# Altium PCB kicanka_PCB.PcbDoc
Units mm, origin at the board's own origin, x right, y up, seen from the top; angles counter-clockwise.
Board outline 25 x 33.67 mm, 2 copper layers (Top Layer, Bottom Layer); 2 components, 2 nets, 5 pads, 0 vias.
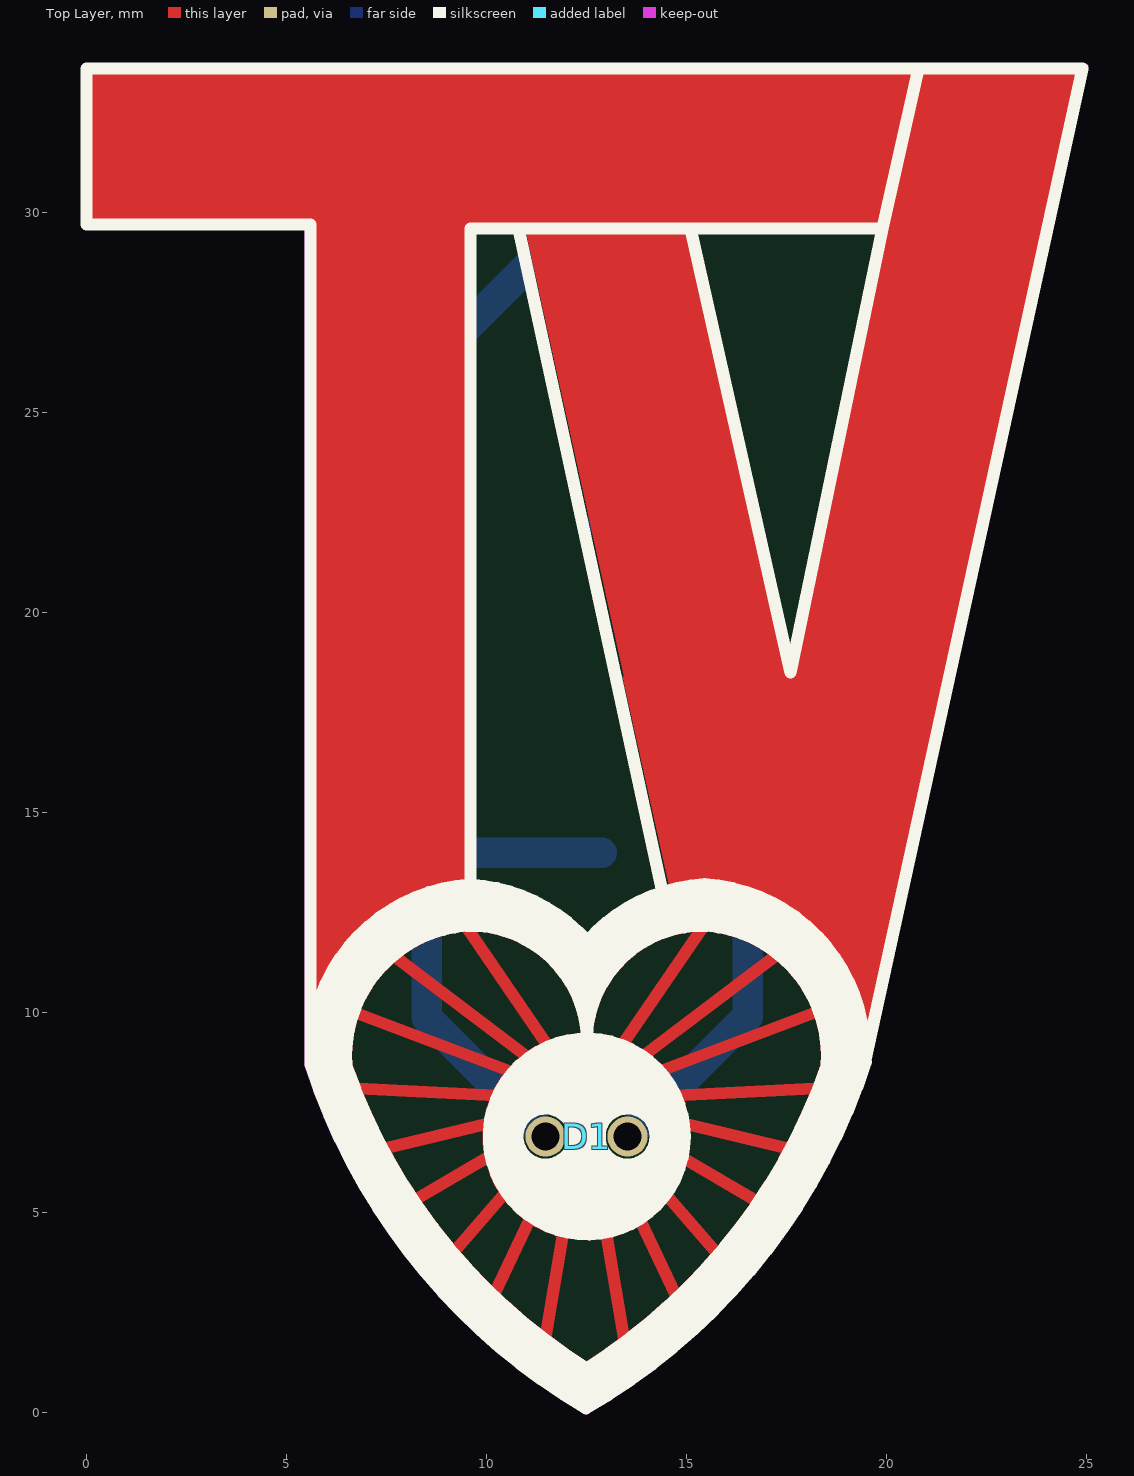
[diagram p0: Top Layer view]
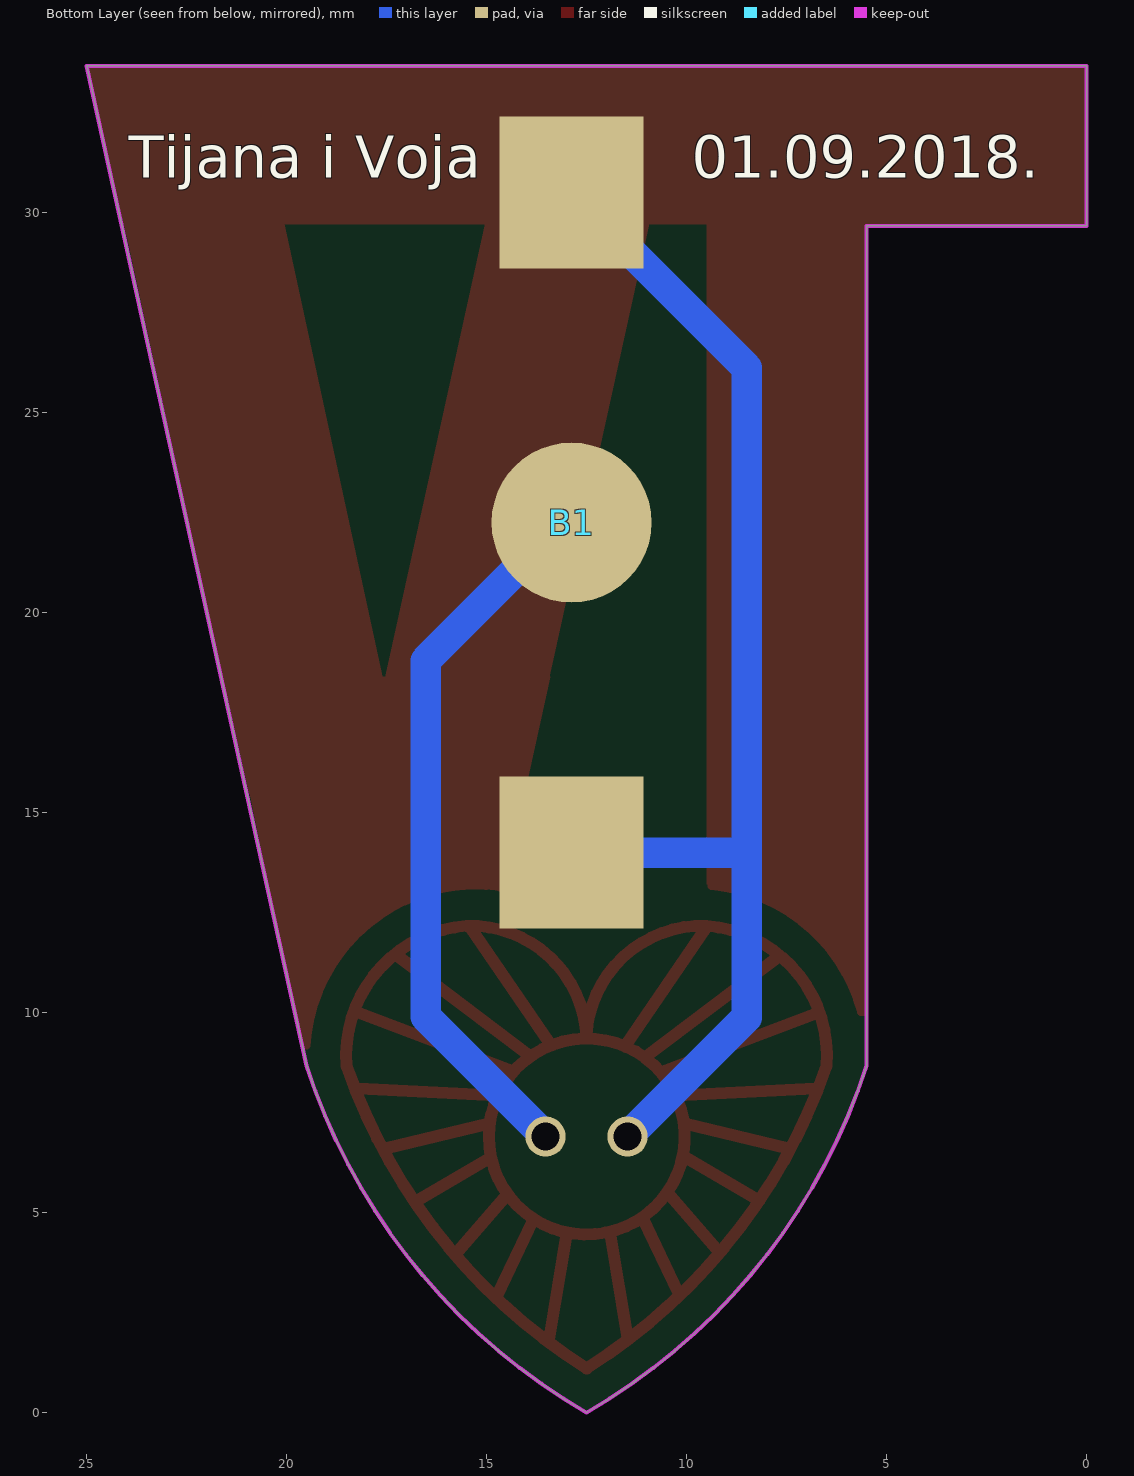
[diagram p1: Bottom Layer view, seen from below]

## Layer stack, top to bottom
Top Solder: solder mask 0.0102, Solder Resist, Dk 3.5
Top Layer: signal copper 0.0356
Dielectric 1: dielectric 0.32, FR-4, Dk 4.8
Bottom Layer: signal copper 0.0356
Bottom Solder: solder mask 0.0102, Solder Resist, Dk 3.5

## Board outline
0,29.669 5.5,29.669 5.5,8.669 ccw(c20.25,13.419) 12.5,0 ccw(c4.75,13.419) 19.5,8.669 25,33.669 0,33.669

## Design rules (kind name [scope] priority, off if disabled: settings)
Clearance [All] p1: gap=0.254 ignorepadtopadclearanceinfootprint=FALSE except(0: Arc-Hole Track-Hole SMDPad-Hole THPad-Hole Via-Hole Fill-Hole Poly-Hole Region-Hole Text-Hole)
PolygonConnect [All] p1: connectstyle=Relief reliefconductorwidth=0.254 reliefentries=4 polygonreliefangle="90 Angle" airgapwidth=0.254
RoutingVias [All] p1: holewidth=0.711 width=1.27 viastyle="Through Hole" minholewidth=0.711 minwidth=1.27 maxholewidth=0.711 maxwidth=1.27
SolderMaskExpansion [All] p1: expansion=0.102
Width [All] p1: maxlimit=5 minlimit=0.2 preferedwidth=0.254 minimp=50.000000 maximp=50.000000 favimp=50.000000
30 further rules are at their usual default settings.

## Components (designator, comment, footprint, x,y, rotation, side; value= is the part's Value field where it differs from the comment)
B1 "bat" bat 12.875,22.25 r90 bottom
D1 "Diode" LED 12.5,6.9 r0 top

## Footprints (in the part's own frame and the unit in brackets; to place one, negate y for a bottom-side part, rotate by r counter-clockwise, add the part's x,y. Pads: shape width x height; smd on the part's side, far side on the other; paste and mask are expansions set on the pad)
bat [mm]
  round 4 smd paste+0 mask+0: 1(0,0)
  rect 3.8x3.6 smd paste+0 mask+0: 2(-8.25,0) 2(8.25,0)
  body extent -9.78,-6.35 16.75,6.35, height 3.17
LED [mm]
  round 1 hole 0.7 unplated paste+0 mask+0: 1(-1.025,0) 2(1.025,0)
  body extent -2.9,-2.9 2.9,2.9, height 1.5

## Nets (pads, with @x,y where several pads share a name; then routed paths per layer and width w, separated by ;. In a path a pad name is that pad's centre, name@x,y a point inside that pad or via, vN(x,y) a via of type N, cw(c..) or ccw(c..) an arc to the next point about the centre after c; other vN are vias at no path point)
GND: B1.1 D1.2 | length 18.2
  Bottom Layer w0.762: B1.1 13.075,22.25 16.525,18.8 16.525,9.9 D1.2
VCC: B1.2 D1.1 | length 31.1
  Bottom Layer w0.762: D1.1 8.5,9.875 8.5,14.1 ; B1.2@12.875,14 8.6,14 8.5,14.1 ; B1.2@12.875,30.5 8.5,26.125 8.5,14.1
copper on no net: | length 183.9
  Top Layer w0.2: 5.56,10.009 5.6,13.275 ; 5.635,10.009 cw(c9.75,8.919) 9.374,13.159 ; 14.667,13.136 cw(c15.25,8.919) 19.5,9.175 ; 19.55,9.275 20.85,15.625
  Top Layer w0.3: 12.494,1.104 ccw(c4.75,13.419) 18.5,8.669 ccw(c15.25,8.919) 15.5,12.169 ccw(c15.403,9.272) 12.506,9.369 ccw(c9.603,9.266) 9.5,12.169 ccw(c9.75,8.919) 6.5,8.669 ccw(c20.25,13.419) 12.506,1.104 ; 6.7,10 10.6,8.525 6.7,10 ; 6.775,8.1 10.25,7.925 6.775,8.1 ; 7.45,6.6 10.05,7.225 7.45,6.6 ; 7.7,11.4 11.019,8.892 7.7,11.4 ; 8.175,5.3 10.033,6.386 8.175,5.3 ; 9.175,4 10.475,5.5 9.175,4 ; 9.5,12.144 11.525,9.175 9.5,12.144 ; 10.194,2.966 11.1,4.875 10.194,2.966 ; 11.475,1.875 11.908,4.474 11.475,1.875 ; 13,4.449 13.433,1.85 13,4.449 ; 13.427,9.239 15.408,12.144 13.427,9.239 ; 13.833,4.825 14.739,2.916 13.833,4.825 ; 13.96,8.945 17.208,11.4 13.96,8.945 ; 14.383,8.55 18.283,10.025 14.383,8.55 ; 14.483,5.45 15.783,3.95 14.483,5.45 ; 14.733,7.925 18.208,8.1 14.733,7.925 ; 14.925,6.361 16.783,5.275 14.925,6.361 ; 14.933,7.225 17.533,6.6 14.933,7.225 ; 14.944,6.9 ccw(c12.494,6.9) 14.944,6.9

## Keep-outs
Keep-Out Layer:
  lines w0.1: 5.5,8.669 ccw(c20.25,13.419) 12.5,0 ccw(c4.75,13.419) 19.5,8.669 25,33.669 0,33.669 0,29.669 5.5,29.669 5.5,8.669 ; 5.5,8.669 5.5,8.669

## Other copper
Top Layer:
  rectangle: 5.5,13.2 9.5,29.8
  rectangle: 0,29.7 24.1,33.7
  region: 20.85,15.625 20.5,14 19.55,9.275 19.45,9.375 19.45,9.9 19.275,10.075 19.275,10.487 19.15,10.612 19.15,10.875 18.825,11.2 18.825,11.35 17.775,12.4 17.65,12.4 17.325,12.725 17.05,12.725 16.8,12.975 16.375,12.975 16.233,13.117 14.808,13.117 14.775,13.15 17.25,15.625
  region: 5.6,13.275 5.56,13.235 5.56,10.009 5.635,10.009 5.635,10.335 5.8,10.5 5.8,10.725 6,10.925 6,11.072 6.325,11.397 6.325,11.525 7.325,12.525 7.475,12.525 7.7,12.75 7.875,12.75 8,12.875 8.194,12.875 8.294,12.975 8.425,12.975 8.525,13.075 9.29,13.075 9.374,13.159 9.374,13.35
  region: 20.1,29.9 17.5,17.9 21.5,17.9 24.1,29.9
  region: 10.9,29.9 13.5,18.1 17.6,18.1 15,29.9
  region: 13.411,18.4 14.6,13 20.928,15.472 21.583,18.4
  region: 24,33.7 25,33.7 24,29.4
  region: 0,33.7

## Silkscreen, mask and mechanical layers (free items; w line width, h text height)
Top Overlay:
  circle w0.2: c12.506,6.9 r2.5
  circle w0.2: c13.525,6.9 r0.65
  circle w0.2: c11.475,6.9 r0.65
  circle w0.5: c12.518,6.9 r0.218
  circle w0.8: c12.506,6.9 r2.056
  region: 14.225,6.375 14.225,6.1 13.214,5.089 11.711,5.089 10.675,6.125 10.675,6.575 10.8,6.7 10.8,6.625 11.175,6.25 11.75,6.25 12.2,6.7 12.8,6.7 13.225,6.275 13.775,6.275 14.025,6.525 14.3,6.525 14.325,6.5
  region: 10.725,7.425 10.725,7.7 11.736,8.711 13.239,8.711 14.275,7.675 14.275,7.225 14.15,7.1 14.15,7.175 13.775,7.55 13.2,7.55 12.75,7.1 12.15,7.1 11.725,7.525 11.175,7.525 10.925,7.275 10.65,7.275 10.625,7.3
  region: 19.377,8.8 18.477,8.669 18.177,7.7 17.627,6.7 16.777,5.2 15.677,3.8 14.477,2.6 13.177,1.6 12.483,1.104 12.494,0.1 13.977,1.1 15.877,2.8 17.027,4.2 18.077,5.8 19.177,8.1 19.377,8.7
  region: 5.6,8.8 6.5,8.669 6.8,7.7 7.35,6.7 8.2,5.2 9.3,3.8 10.5,2.6 11.8,1.6 12.494,1.104 12.483,0.1 11,1.1 9.1,2.8 7.95,4.2 6.9,5.8 5.8,8.1 5.6,8.7
  region: 19.4,9.7 19,10.8 18.3,11.9 17.3,12.6 16.2,13.1 15.4,13.2 14.4,13 13.4,12.6 12.8,12.1 12.491,11.78 12.494,9.369 12.7,10.4 13.1,11.1 13.7,11.7 14.5,12.1 15.2,12.169 15.9,12.169 16.7,11.9 17.4,11.5 17.9,10.9 18.2,10.4 18.5,9.5 18.5,8.669 19.4,8.7
  region: 5.6,9.7 6,10.8 6.7,11.9 7.7,12.6 8.8,13.1 9.6,13.2 10.6,13 11.6,12.6 12.2,12.1 12.509,11.78 12.506,9.369 12.3,10.4 11.9,11.1 11.3,11.7 10.5,12.1 9.8,12.169 9.1,12.169 8.3,11.9 7.6,11.5 7.1,10.9 6.8,10.4 6.5,9.5 6.5,8.669 5.6,8.7
  lines w0.3: 9.6,13.3 9.6,29.6 10.8,29.6 ; 12.494,1.104 ccw(c4.75,13.419) 18.5,8.669 ccw(c15.25,8.919) 15.5,12.169 ccw(c15.403,9.272) 12.506,9.369 ; 12.494,7.8 12.506,9.369 ; 12.506,1.104 cw(c20.25,13.419) 6.5,8.669 cw(c9.75,8.919) 9.5,12.169 cw(c9.603,9.266) 12.506,9.369 ; 12.509,11.78 cw(c15.699,8.961) 15.449,13.211 cw(c15.199,8.961) 19.449,8.711 24.9,33.6 0,33.6 0,29.7 5.6,29.7 5.6,8.7 ; 12.521,11.791 ccw(c9.35,8.95) 9.6,13.2 ccw(c9.85,8.95) 5.6,8.7 ; 14.4,13 10.8,29.6 ; 15.1,29.6 17.6,18.5 19.9,29.6 ; 19.483,8.769 cw(c4.733,13.519) 12.483,0.1 cw(c20.35,13.451) 5.6,8.7 ; 20.8,33.6 19.9,29.6 ; 10.8,29.6 19.9,29.6
Bottom Overlay:
  text "01.09.2018." at 9.875,30.525 h1.8
  text "Tijana i Voja" at 23.95,30.525 h1.8
Top Solder:
  lines w0.3: 6.7,10 10.6,8.525 ; 6.775,8.1 10.25,7.925 ; 7.45,6.6 10.05,7.225 ; 7.7,11.4 11.019,8.892 ; 8.175,5.3 10.033,6.386 ; 9.175,4 10.475,5.5 ; 9.5,12.144 11.525,9.175 ; 10.194,2.966 11.1,4.875 ; 11.475,1.875 11.908,4.474 ; 13,4.449 13.433,1.85 ; 13.427,9.239 15.408,12.144 ; 13.833,4.825 14.739,2.916 ; 13.96,8.945 17.208,11.4 ; 14.383,8.55 18.283,10.025 ; 14.483,5.45 15.783,3.95 ; 14.733,7.925 18.208,8.1 ; 14.925,6.361 16.783,5.275 ; 14.933,7.225 17.533,6.6
Mechanical 1:
  circle w0.2: c12.494,6.9 r2.5
  lines w0.2: 0,29.675 5.5,29.669 5.5,8.669 ; 10.909,29.625 14.563,13.016 ; 12.481,1.104 ccw(c4.737,13.419) 18.487,8.669 ccw(c15.237,8.919) 15.487,12.169 ccw(c15.391,9.272) 12.494,9.369 ccw(c9.591,9.266) 9.487,12.169 ccw(c9.737,8.919) 6.487,8.669 ccw(c20.237,13.419) 12.494,1.104 ; 12.497,11.666 cw(c15.75,8.919) 15.5,13.169 cw(c15.25,8.919) 19.5,8.669 ; 12.5,11.668 ccw(c9.25,8.919) 9.5,13.169 ; 15.029,29.675 17.516,18.368 20.881,33.662 ; 20,29.669 9.5,29.669 9.5,13.169 ; 5.5,8.669 cw(c9.75,8.919) 9.5,13.169 ; 5.5,8.669 ccw(c20.25,13.419) 12.5,0 ccw(c4.75,13.419) 19.5,8.669 ; 19.5,8.669 25,33.669 ; 25,33.669 0,33.669 0,0 25,0 25,33.669
Mechanical 3:
  the board outline again, w0.2

## Dimensions
0,0 to 25,0 on Mechanical 1
25,33.669 to 25,0 on Mechanical 1